# EAGLE board attiny45light (EAGLE 9.4.2)
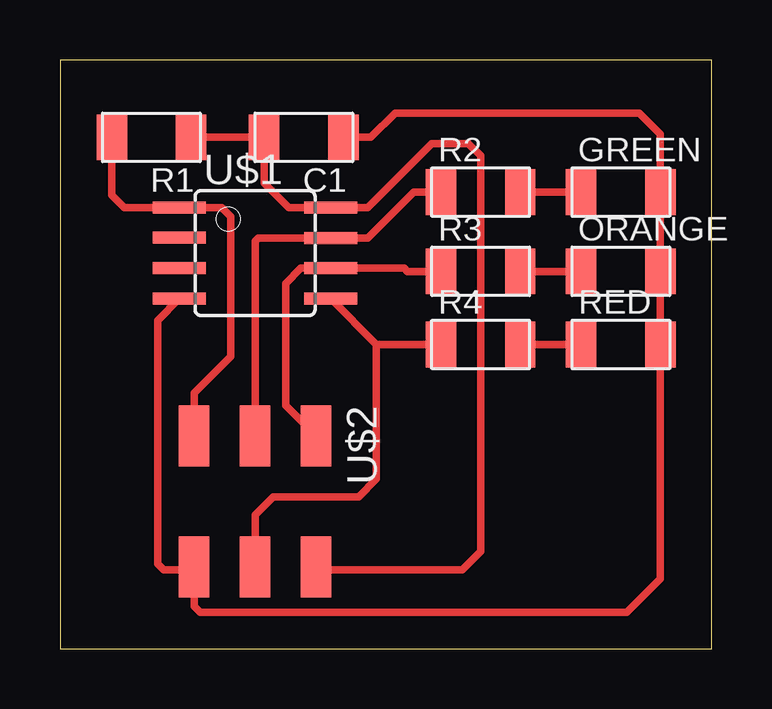
[diagram p0: board, top side]

Size 27.16 x 24.56 mm. Coordinates in mm from the lower left corner, seen from the top.
Outline: 0,0 27.16,0 27.16,24.56 0,24.56 0,0
Copper layers (1*16): Top 0.035mm / dielectric 1.5mm / Bottom 0.035mm
Design rules "default *": minimum track width 12mil, minimum drill 0.35mm, track to track 17mil, track to pad 17mil, pad to pad 17mil, via to via 17mil, smd to smd 17mil, copper to edge 40mil, drill to drill 6mil, minimum pad ring 10mil, minimum via ring 8mil, stop-mask expansion 4mil, vias tented up to drill 0mil, thermal gap 17mil

## Footprints (pad centres in the part's own frame; a part is rotated, then mirrored left to right if it is on the bottom)
C1206FAB = smd 1.27 x 1.905: 1 -1.651,0; 2 1.651,0
LED1206FAB = smd 1.27 x 1.905: 1 -1.651,0; 2 1.651,0
R1206FAB = smd 1.27 x 1.905: 1 -1.651,0; 2 1.651,0
SOIC8 = smd 0.5 x 2.2: 1 -1.905,-3.154; 2 -0.645,-3.154; 3 0.625,-3.154; 4 1.895,-3.154; 5 1.905,3.154; 6 0.635,3.154; 7 -0.635,3.154; 8 -1.905,3.154
2X03SMD = smd 2.54 x 1.27: 1 -2.54,2.54; 2 2.92,2.54; 3 -2.54,0; 4 2.92,0; 5 -2.54,-2.54; 6 2.92,-2.54

## Placement (x,y rotation side)
C1  1uF  [C1206FAB]  10.16,21.34 180 top
GREEN  LEDFAB1206  [LED1206FAB]  23.37,19.05 0 top
ORANGE  LEDFAB1206  [LED1206FAB]  23.37,15.75 0 top
R1  10K  [R1206FAB]  3.81,21.34 180 top
R2  499  [R1206FAB]  17.53,19.05 0 top
R3  499  [R1206FAB]  17.53,15.75 0 top
R4  499  [R1206FAB]  17.53,12.7 0 top
RED  LEDFAB1206  [LED1206FAB]  23.37,12.7 0 top
U$1  UC_ATTINY45SI  [SOIC8]  8.13,16.51 270 top
U$2  CONN_03X2_AVRISPSMD  [2X03SMD]  8.13,6.35 270 top

## Library data of the parts
C1 GREEN ORANGE R1-R4 RED = fab
U$1 U$2 = fab2

## Nets
GND: C1.1 GREEN.2 ORANGE.2 RED.2 U$1.4 U$2.6
MISO: R3.1 U$1.6 U$2.1
MOSI: R4.1 U$1.5 U$2.4
N$4: GREEN.1 R2.2
N$5: ORANGE.1 R3.2
N$6: R4.2 RED.1
RST: R1.2 U$1.1 U$2.5
SCK: R2.1 U$1.7 U$2.3
VCC: C1.2 R1.1 U$1.8 U$2.2

## Tracks (layer width: path | path; a pad name or v marks a point on that pad's centre or on a via)
GND
  Top 0.305: U$1.4 4.06,13.71 4.06,3.56 4.32,3.3 5.46,3.3 U$2.6 5.59,1.78 5.84,1.52 23.62,1.52 25.02,2.92 RED.2 ORANGE.2 GREEN.2 25.02,21.46 24.13,22.35 13.97,22.35 12.95,21.34 C1.1
MISO
  Top 0.305: U$2.1 9.4,10.16 9.4,15.24 10.03,15.88 U$1.6 14.35,15.88 14.48,15.75 R3.1
MOSI
  Top 0.305: U$1.5 13.19,12.7 | 13.19,12.7 R4.1 | U$2.4 8.13,5.59 8.89,6.35 12.45,6.35 13.19,7.09 13.19,12.7
N$4
  Top 0.305: R2.2 GREEN.1
N$5
  Top 0.305: R3.2 ORANGE.1
N$6
  Top 0.305: R4.2 RED.1
RST
  Top 0.305: 4.7,18.41 U$1.1 | U$2.5 5.59,10.67 7.11,12.19 7.11,18.03 6.73,18.41 U$1.1 | U$1.1 2.67,18.41 2.16,18.92 R1.2
SCK
  Top 0.305: U$2.3 8.13,17.02 8.26,17.14 U$1.7 12.83,17.14 14.73,19.05 R2.1
VCC
  Top 0.305: R1.1 C1.2 8.51,19.43 9.53,18.41 U$1.8 12.83,18.41 14.66,20.24 | 14.66,20.24 | 14.66,20.24 15.49,21.08 17.02,21.08 17.53,20.57 17.53,4.06 16.76,3.3 10.8,3.3 U$2.2